# Altium PCB Expansion Header rev1.PcbDoc
Units mm, origin at the board's own origin, x right, y up, seen from the top; angles counter-clockwise.
Board outline 151 x 50.8 mm, 4 copper layers (Top Layer, Internal Plane 1, Internal Plane 2, Bottom Layer), stack 1.573 mm thick; 140 components, 131 nets, 573 pads, 156 vias.
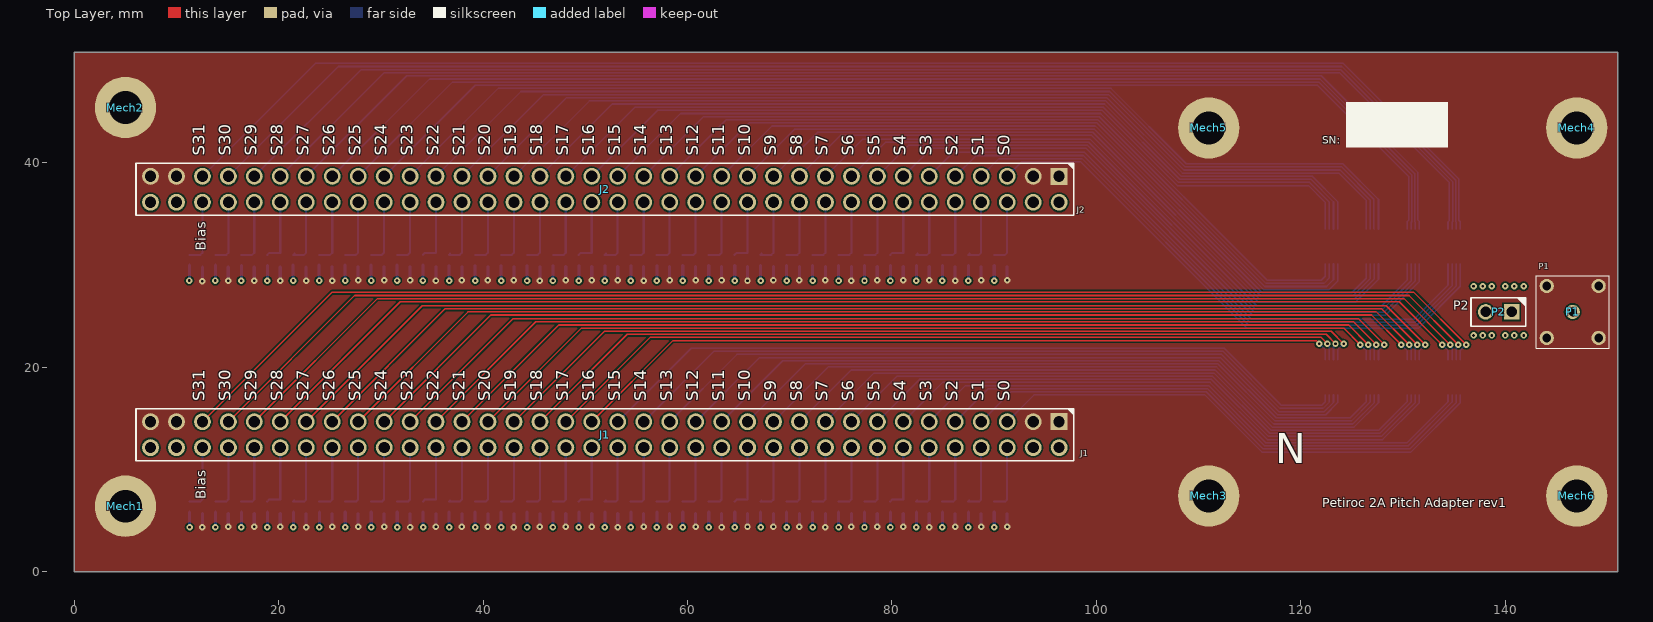
[diagram p0: Top Layer view]
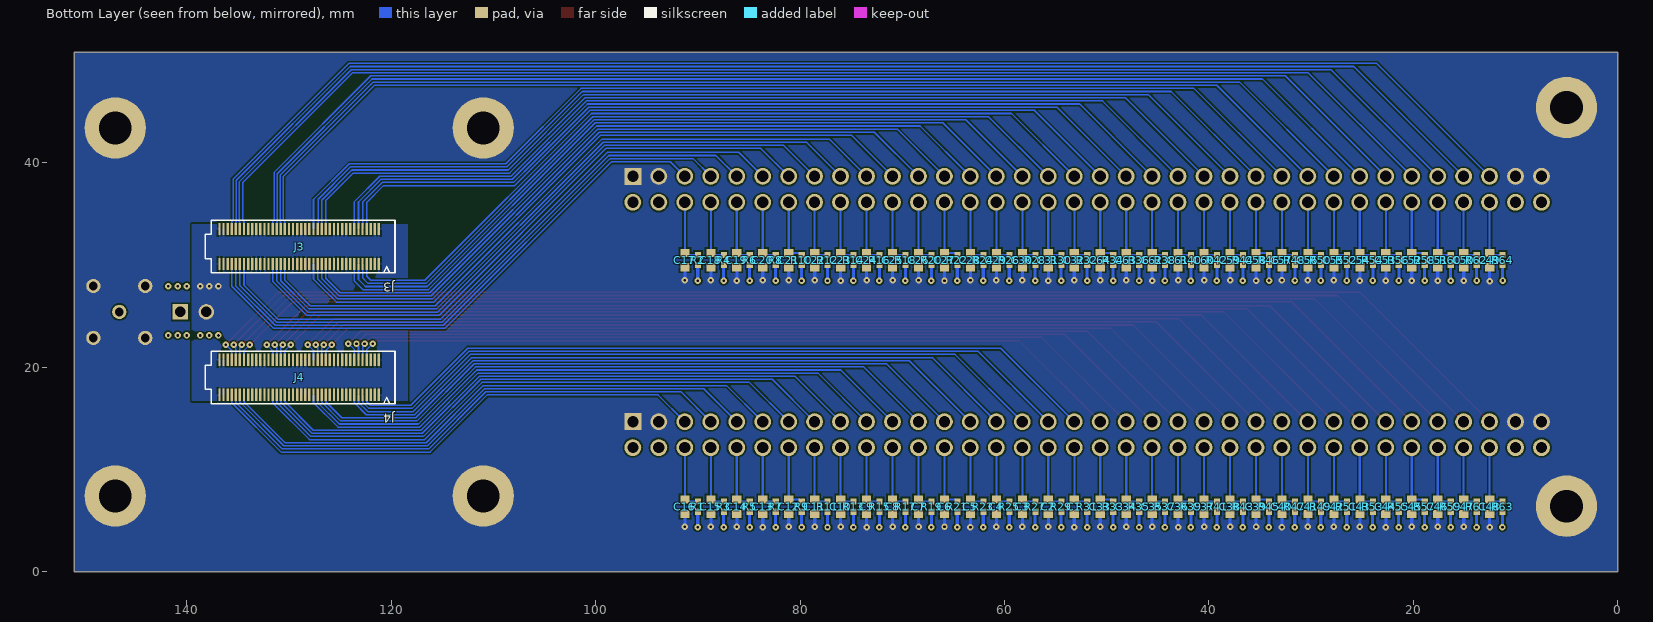
[diagram p1: Bottom Layer view, seen from below]
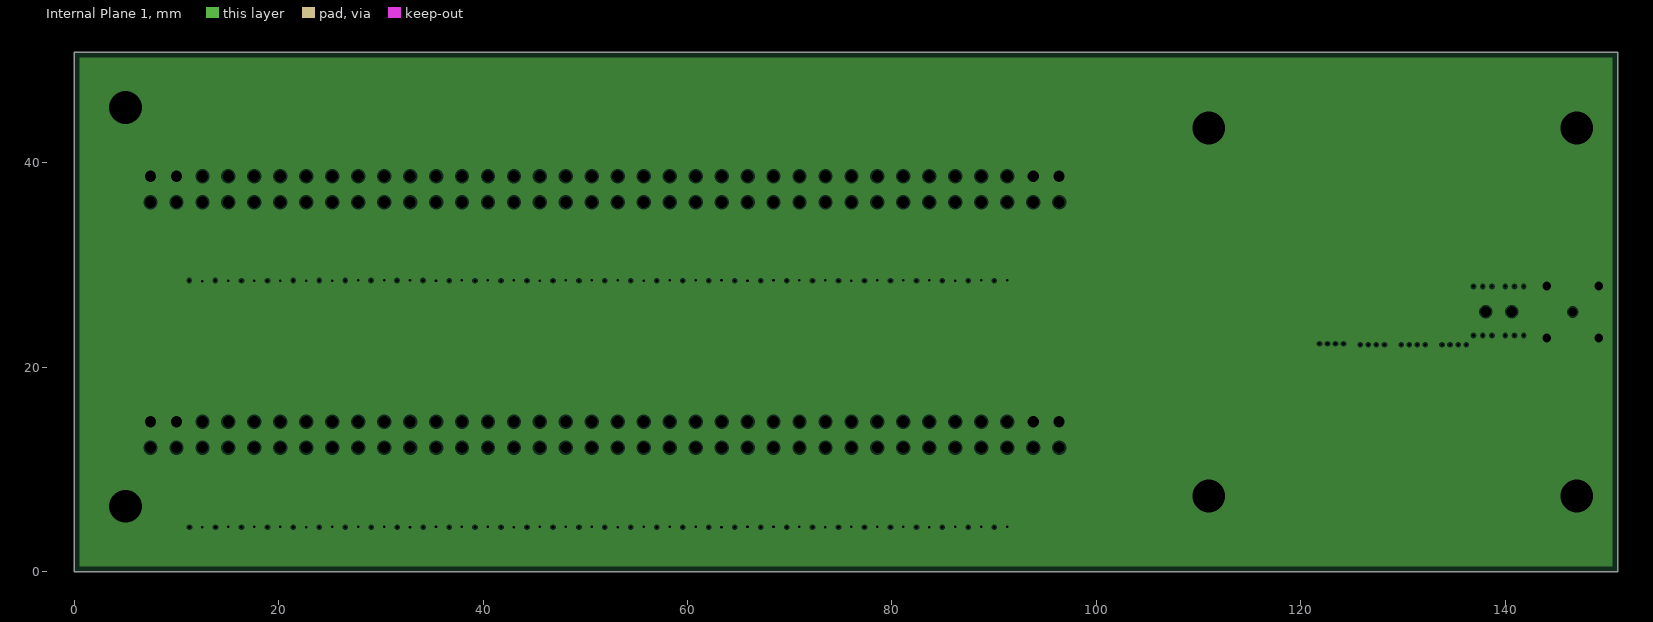
[diagram p2: Internal Plane 1, clearances drawn from the general rule]
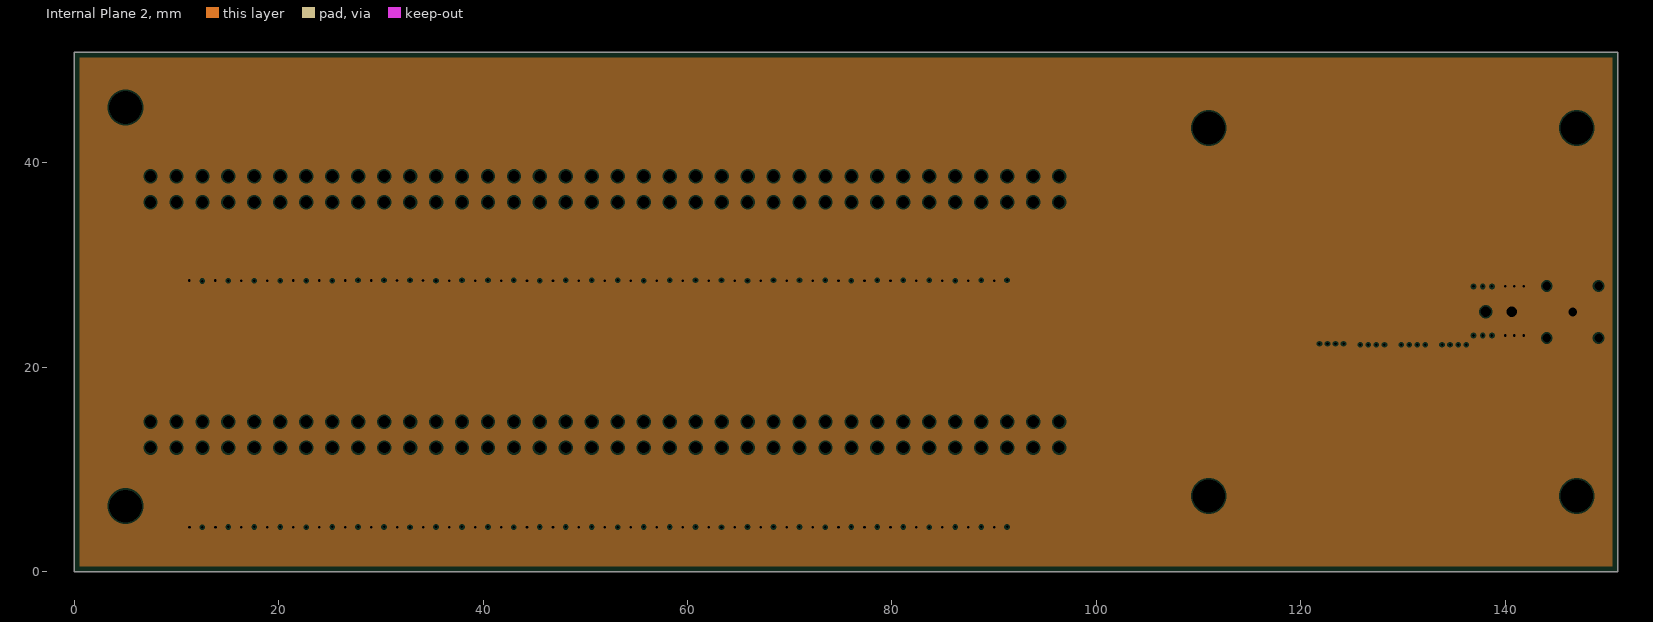
[diagram p3: Internal Plane 2, clearances drawn from the general rule]
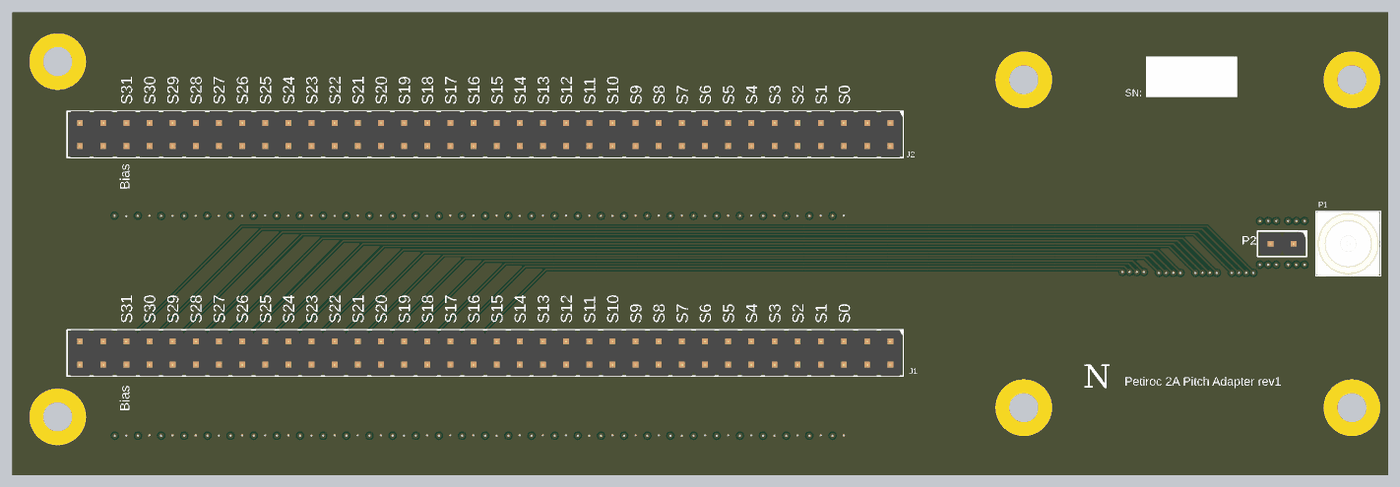
[diagram p4: 3D render of the assembled board from above, using the file's embedded part models]
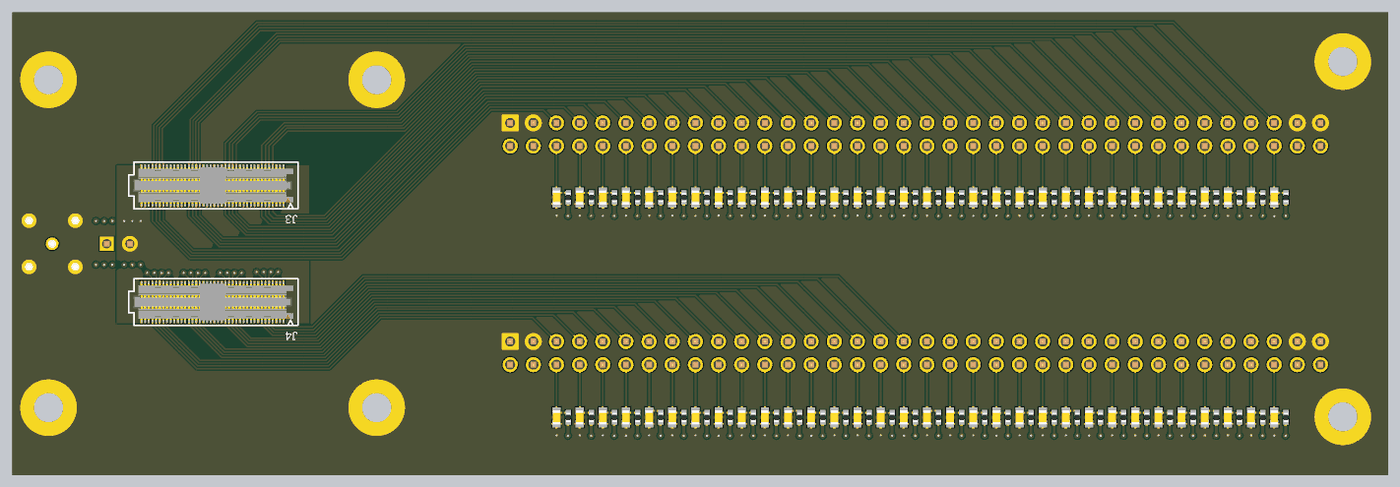
[diagram p5: 3D render of the assembled board from below, using the file's embedded part models]

## Layer stack, top to bottom
Top Solder: solder mask 0.0102, Solder Resist, Dk 3.5
Top Layer: signal copper 0.0356
Dielectric 1: core 0.36, FR-4, Dk 4.2
Internal Plane 1: plane copper 0.036, net GND
Dielectric 3: prepreg 0.71, Dk 4.2
Internal Plane 2: plane copper 0.036, net HV1
Dielectric 2: core 0.36, Dk 4.2
Bottom Layer: signal copper 0.0356
Bottom Solder: solder mask 0.0102, Solder Resist, Dk 3.5

## Board outline
0,0 0,50.8 151,50.8 151,0

## Design rules (kind name [scope] priority, off if disabled: settings)
Clearance HV [InNet('HV')] p1: gap=0.152 ignorepadtopadclearanceinfootprint=FALSE
Clearance [All] p2: gap=0.152 ignorepadtopadclearanceinfootprint=FALSE
DiffPairsRouting [All] p1: maxlimit=1.27 minlimit=0.152 mostfreqgap=0.152 toplayer_minwidth=0.127 toplayer_maxwidth=1.27 toplayer_prefwidth=0.152 bottomlayer_minwidth=0.127 bottomlayer_maxwidth=1.27 bottomlayer_prefwidth=0.152 maxuncoupledlength=12.7
MinimumSolderMaskSliver [All] p1: minsoldermaskwidth=0.025
PlaneClearance [All] p1: clearance=0.152
PlaneConnect [All] p1: planeconnectstyle=Direct reliefexpansion=0.508 reliefentries=4 reliefconductorwidth=0.152 reliefairgap=0.152
PolygonConnect VIas [IsVia or IsThruPin] p1: connectstyle=Direct reliefconductorwidth=0.254 reliefentries=4 polygonreliefangle="90 Angle" airgapwidth=0.254
PolygonConnect [All] p2: connectstyle=Relief reliefconductorwidth=0.152 reliefentries=4 polygonreliefangle="90 Angle" airgapwidth=0.152
RoomDefinition U_Connector_1 [InComponentClass('U_Connector_1')] p1: confinementstyle=ConfineIn formatcopy=TRUE lockcomponents=FALSE outline -205.392,-214.916 -154.592,-214.916 -154.592,-189.516 -205.392,-189.516
RoomDefinition U_Mech [InComponentClass('U_Mech')] p2: confinementstyle=ConfineIn formatcopy=TRUE lockcomponents=FALSE outline 151,0.2 151,50.7 -0.3,50.7 -0.3,0.2
RoutingVias [All] p1: holewidth=0.254 width=0.635 viastyle="Through Hole" minholewidth=0.254 minwidth=0.635 maxholewidth=2.54 maxwidth=5.08
SilkToSolderMaskClearance [IsPad] p1: minsilkscreentomaskgap=0.051 clearancetoexposedcopper=TRUE
SolderMaskExpansion [All] p1: expansion=0.102
Width [All] p1: maxlimit=5.08 minlimit=0.152 preferedwidth=0.152
25 further rules are at their usual default settings.

## Classes and differential pairs
component class U_Mech: Mech1 Mech2 Mech3 Mech4 Mech5 Mech6

## Components (designator, comment, footprint, x,y, rotation, side; value= is the part's Value field where it differs from the comment)
C1 "0603" CAPCERSMD0603 53.163,6.346 r270 bottom value="100 nF 100 V"
C2 "0603" CAPCERSMD0603 55.703,6.346 r270 bottom value="100 nF 100 V"
C3 "0603" CAPCERSMD0603 58.243,6.346 r270 bottom value="100 nF 100 V"
C4 "0603" CAPCERSMD0603 60.783,6.346 r270 bottom value="100 nF 100 V"
C5 "0603" CAPCERSMD0603 63.323,6.346 r270 bottom value="100 nF 100 V"
C6 "0603" CAPCERSMD0603 65.863,6.346 r270 bottom value="100 nF 100 V"
C7 "0603" CAPCERSMD0603 68.403,6.346 r270 bottom value="100 nF 100 V"
C8 "0603" CAPCERSMD0603 70.943,6.346 r270 bottom value="100 nF 100 V"
C9 "0603" CAPCERSMD0603 73.483,6.346 r270 bottom value="100 nF 100 V"
C10 "0603" CAPCERSMD0603 76.023,6.346 r270 bottom value="100 nF 100 V"
C11 "0603" CAPCERSMD0603 78.563,6.346 r270 bottom value="100 nF 100 V"
C12 "0603" CAPCERSMD0603 81.103,6.346 r270 bottom value="100 nF 100 V"
C13 "0603" CAPCERSMD0603 83.643,6.346 r270 bottom value="100 nF 100 V"
C14 "0603" CAPCERSMD0603 86.183,6.346 r270 bottom value="100 nF 100 V"
C15 "0603" CAPCERSMD0603 88.723,6.346 r270 bottom value="100 nF 100 V"
C16 "0603" CAPCERSMD0603 91.263,6.346 r270 bottom value="100 nF 100 V"
C17 "0603" CAPCERSMD0603 91.263,30.479 r270 bottom value="100 nF 100 V"
C18 "0603" CAPCERSMD0603 88.723,30.479 r270 bottom value="100 nF 100 V"
C19 "0603" CAPCERSMD0603 86.183,30.479 r270 bottom value="100 nF 100 V"
C20 "0603" CAPCERSMD0603 83.643,30.479 r270 bottom value="100 nF 100 V"
C21 "0603" CAPCERSMD0603 81.103,30.479 r270 bottom value="100 nF 100 V"
C22 "0603" CAPCERSMD0603 78.563,30.479 r270 bottom value="100 nF 100 V"
C23 "0603" CAPCERSMD0603 76.023,30.479 r270 bottom value="100 nF 100 V"
C24 "0603" CAPCERSMD0603 73.483,30.479 r270 bottom value="100 nF 100 V"
C25 "0603" CAPCERSMD0603 70.943,30.479 r270 bottom value="100 nF 100 V"
C26 "0603" CAPCERSMD0603 68.403,30.479 r270 bottom value="100 nF 100 V"
C27 "0603" CAPCERSMD0603 65.863,30.479 r270 bottom value="100 nF 100 V"
C28 "0603" CAPCERSMD0603 63.323,30.479 r270 bottom value="100 nF 100 V"
C29 "0603" CAPCERSMD0603 60.783,30.479 r270 bottom value="100 nF 100 V"
C30 "0603" CAPCERSMD0603 58.243,30.479 r270 bottom value="100 nF 100 V"
C31 "0603" CAPCERSMD0603 55.703,30.479 r270 bottom value="100 nF 100 V"
C32 "0603" CAPCERSMD0603 53.163,30.479 r270 bottom value="100 nF 100 V"
C33 "0603" CAPCERSMD0603 50.623,6.346 r270 bottom value="100 nF 100 V"
C34 "0603" CAPCERSMD0603 48.083,6.346 r270 bottom value="100 nF 100 V"
C35 "0603" CAPCERSMD0603 45.543,6.346 r270 bottom value="100 nF 100 V"
C36 "0603" CAPCERSMD0603 43.003,6.346 r270 bottom value="100 nF 100 V"
C37 "0603" CAPCERSMD0603 40.463,6.346 r270 bottom value="100 nF 100 V"
C38 "0603" CAPCERSMD0603 37.923,6.346 r270 bottom value="100 nF 100 V"
C39 "0603" CAPCERSMD0603 35.383,6.346 r270 bottom value="100 nF 100 V"
C40 "0603" CAPCERSMD0603 32.843,6.346 r270 bottom value="100 nF 100 V"
C41 "0603" CAPCERSMD0603 30.303,6.346 r270 bottom value="100 nF 100 V"
C42 "0603" CAPCERSMD0603 27.763,6.346 r270 bottom value="100 nF 100 V"
C43 "0603" CAPCERSMD0603 25.223,6.346 r270 bottom value="100 nF 100 V"
C44 "0603" CAPCERSMD0603 22.683,6.346 r270 bottom value="100 nF 100 V"
C45 "0603" CAPCERSMD0603 20.143,6.346 r270 bottom value="100 nF 100 V"
C46 "0603" CAPCERSMD0603 17.603,6.346 r270 bottom value="100 nF 100 V"
C47 "0603" CAPCERSMD0603 15.063,6.346 r270 bottom value="100 nF 100 V"
C48 "0603" CAPCERSMD0603 12.523,6.346 r270 bottom value="100 nF 100 V"
C49 "0603" CAPCERSMD0603 12.523,30.479 r270 bottom value="100 nF 100 V"
C50 "0603" CAPCERSMD0603 15.063,30.479 r270 bottom value="100 nF 100 V"
C51 "0603" CAPCERSMD0603 17.603,30.479 r270 bottom value="100 nF 100 V"
C52 "0603" CAPCERSMD0603 20.143,30.479 r270 bottom value="100 nF 100 V"
C53 "0603" CAPCERSMD0603 22.683,30.479 r270 bottom value="100 nF 100 V"
C54 "0603" CAPCERSMD0603 25.223,30.479 r270 bottom value="100 nF 100 V"
C55 "0603" CAPCERSMD0603 27.763,30.479 r270 bottom value="100 nF 100 V"
C56 "0603" CAPCERSMD0603 30.303,30.479 r270 bottom value="100 nF 100 V"
C57 "0603" CAPCERSMD0603 32.843,30.479 r270 bottom value="100 nF 100 V"
C58 "0603" CAPCERSMD0603 35.383,30.479 r270 bottom value="100 nF 100 V"
C59 "0603" CAPCERSMD0603 37.923,30.479 r270 bottom value="100 nF 100 V"
C60 "0603" CAPCERSMD0603 40.463,30.479 r270 bottom value="100 nF 100 V"
C61 "0603" CAPCERSMD0603 43.003,30.479 r270 bottom value="100 nF 100 V"
C62 "0603" CAPCERSMD0603 45.543,30.479 r270 bottom value="100 nF 100 V"
C63 "0603" CAPCERSMD0603 48.083,30.479 r270 bottom value="100 nF 100 V"
C64 "0603" CAPCERSMD0603 50.623,30.479 r270 bottom value="100 nF 100 V"
J1 "Male 72 pin, dual row, 2.54 mm pitch" Wurth_WR-PHD_male_2rows_vertical_2.54pitch_72ways 51.903,13.396 r180 top
J2 "Male 72 pin, dual row, 2.54 mm pitch" Wurth_WR-PHD_male_2rows_vertical_2.54pitch_72ways 51.903,37.399 r180 top
J3 "ST4-40-1.00-L-D-P-TR" Samtec_ST4-40-1.00-L-D-P-TR 129,31.8 r0 bottom
J4 "ST4-40-1.00-L-D-P-TR" Samtec_ST4-40-1.00-L-D-P-TR 129,19 r0 bottom
Mech1 "M3" PCBPad_M3_Head6mm 5,6.4 r180 top
Mech2 "M3" PCBPad_M3_Head6mm 5,45.4 r180 top
Mech3 "M3" PCBPad_M3_Head6mm 111,7.4 r270 top
Mech4 "M3" PCBPad_M3_Head6mm 147,43.4 r270 top
Mech5 "M3" PCBPad_M3_Head6mm 111,43.4 r270 top
Mech6 "M3" PCBPad_M3_Head6mm 147,7.4 r0 top
P1 "LEMO" LEMO_EPA.00.250.DTN_Vertical 146.6,25.4 r180 top
P2 "Wurth_WR-PHD_2way_2.54mm_male" Wurth_WR-PHD_2way_2.54mm_male 139.35,25.4 r180 top
R1 "0402" RESSMD0402 89.993,6.346 r90 bottom value="1 k"
R2 "0402" RESSMD0402 89.993,30.479 r270 bottom value="1 k"
R3 "0402" RESSMD0402 87.453,6.346 r90 bottom value="1 k"
R4 "0402" RESSMD0402 87.453,30.479 r270 bottom value="1 k"
R5 "0402" RESSMD0402 84.913,6.346 r90 bottom value="1 k"
R6 "0402" RESSMD0402 84.913,30.479 r270 bottom value="1 k"
R7 "0402" RESSMD0402 82.373,6.346 r90 bottom value="1 k"
R8 "0402" RESSMD0402 82.373,30.479 r270 bottom value="1 k"
R9 "0402" RESSMD0402 79.833,6.346 r90 bottom value="1 k"
R10 "0402" RESSMD0402 79.833,30.479 r270 bottom value="1 k"
R11 "0402" RESSMD0402 77.293,6.346 r90 bottom value="1 k"
R12 "0402" RESSMD0402 77.293,30.479 r270 bottom value="1 k"
R13 "0402" RESSMD0402 74.753,6.346 r90 bottom value="1 k"
R14 "0402" RESSMD0402 74.753,30.479 r270 bottom value="1 k"
R15 "0402" RESSMD0402 72.213,6.346 r90 bottom value="1 k"
R16 "0402" RESSMD0402 72.213,30.479 r270 bottom value="1 k"
R17 "0402" RESSMD0402 69.673,6.346 r90 bottom value="1 k"
R18 "0402" RESSMD0402 69.673,30.479 r270 bottom value="1 k"
R19 "0402" RESSMD0402 67.133,6.346 r90 bottom value="1 k"
R20 "0402" RESSMD0402 67.133,30.479 r270 bottom value="1 k"
R21 "0402" RESSMD0402 64.593,6.346 r90 bottom value="1 k"
R22 "0402" RESSMD0402 64.593,30.479 r270 bottom value="1 k"
R23 "0402" RESSMD0402 62.053,6.346 r90 bottom value="1 k"
R24 "0402" RESSMD0402 62.053,30.479 r270 bottom value="1 k"
R25 "0402" RESSMD0402 59.513,6.346 r90 bottom value="1 k"
R26 "0402" RESSMD0402 59.513,30.479 r270 bottom value="1 k"
R27 "0402" RESSMD0402 56.973,6.346 r90 bottom value="1 k"
R28 "0402" RESSMD0402 56.973,30.479 r270 bottom value="1 k"
R29 "0402" RESSMD0402 54.433,6.346 r90 bottom value="1 k"
R30 "0402" RESSMD0402 54.433,30.479 r270 bottom value="1 k"
R31 "0402" RESSMD0402 51.893,6.346 r90 bottom value="1 k"
R32 "0402" RESSMD0402 51.893,30.479 r270 bottom value="1 k"
R33 "0402" RESSMD0402 49.353,6.346 r90 bottom value="1 k"
R34 "0402" RESSMD0402 49.353,30.479 r270 bottom value="1 k"
R35 "0402" RESSMD0402 46.813,6.346 r90 bottom value="1 k"
R36 "0402" RESSMD0402 46.813,30.479 r270 bottom value="1 k"
R37 "0402" RESSMD0402 44.273,6.346 r90 bottom value="1 k"
R38 "0402" RESSMD0402 44.273,30.479 r270 bottom value="1 k"
R39 "0402" RESSMD0402 41.733,6.346 r90 bottom value="1 k"
R40 "0402" RESSMD0402 41.733,30.479 r270 bottom value="1 k"
R41 "0402" RESSMD0402 39.193,6.346 r90 bottom value="1 k"
R42 "0402" RESSMD0402 39.193,30.479 r270 bottom value="1 k"
R43 "0402" RESSMD0402 36.653,6.346 r90 bottom value="1 k"
R44 "0402" RESSMD0402 36.653,30.479 r270 bottom value="1 k"
R45 "0402" RESSMD0402 34.113,6.346 r90 bottom value="1 k"
R46 "0402" RESSMD0402 34.113,30.479 r270 bottom value="1 k"
R47 "0402" RESSMD0402 31.573,6.346 r90 bottom value="1 k"
R48 "0402" RESSMD0402 31.573,30.479 r270 bottom value="1 k"
R49 "0402" RESSMD0402 29.033,6.346 r90 bottom value="1 k"
R50 "0402" RESSMD0402 29.033,30.479 r270 bottom value="1 k"
R51 "0402" RESSMD0402 26.493,6.346 r90 bottom value="1 k"
R52 "0402" RESSMD0402 26.493,30.479 r270 bottom value="1 k"
R53 "0402" RESSMD0402 23.953,6.346 r90 bottom value="1 k"
R54 "0402" RESSMD0402 23.953,30.479 r270 bottom value="1 k"
R55 "0402" RESSMD0402 21.413,6.346 r90 bottom value="1 k"
R56 "0402" RESSMD0402 21.413,30.479 r270 bottom value="1 k"
R57 "0402" RESSMD0402 18.873,6.346 r90 bottom value="1 k"
R58 "0402" RESSMD0402 18.873,30.479 r270 bottom value="1 k"
R59 "0402" RESSMD0402 16.333,6.346 r90 bottom value="1 k"
R60 "0402" RESSMD0402 16.333,30.479 r270 bottom value="1 k"
R61 "0402" RESSMD0402 13.793,6.346 r90 bottom value="1 k"
R62 "0402" RESSMD0402 13.793,30.479 r270 bottom value="1 k"
R63 "0402" RESSMD0402 11.253,6.346 r90 bottom value="1 k"
R64 "0402" RESSMD0402 11.253,30.479 r270 bottom value="1 k"

## Footprints (in the part's own frame and the unit in brackets; to place one, negate y for a bottom-side part, rotate by r counter-clockwise, add the part's x,y. Pads: shape width x height; smd on the part's side, far side on the other; paste and mask are expansions set on the pad)
CAPCERSMD0603 [mm]
  rect 0.8x0.9 smd: 1(-0.7,0) 2(0.7,0)
  body extent -0.8,-0.43 0.8,0.42, height 0.78
LEMO_EPA.00.250.DTN_Vertical [mm] "Connector; RF Coaxial, LEMO, Thru-Hole; 5 Position; Right Angle"
  round 1.4 hole 0.85: 1(0,0) 2(-2.54,-2.54) 3(2.54,-2.54) 4(2.54,2.54) 5(-2.54,2.54)
  silkscreen extent -3.56,-3.56 3.56,3.56, body extent -3.48,-3.48 3.49,3.48, height 14
PCBPad_M3_Head6mm [mm]
  round 6 hole 3.2: 1(0,0)
RESSMD0402 [mm] "Chip Resistor, Body 1.1x0.5mm, IPC High Density"
  rect 0.6x0.6 smd: 1(-0.5,0) 2(0.5,0)
  body extent -0.5,-0.25 0.5,0.25, height 0.3
Samtec_ST4-40-1.00-L-D-P-TR [mm]
  rect 0.23x1.2 smd paste-0.015 mask+0.05: 1(-7.8,1.71) 2(-7.8,-1.71) 3(-7.4,1.71) 4(-7.4,-1.71) 5(-7,1.71) 6(-7,-1.71) 7(-6.6,1.71) 8(-6.6,-1.71) 9(-6.2,1.71) 10(-6.2,-1.71) 11(-5.8,1.71) 12(-5.8,-1.71) 13(-5.4,1.71) 14(-5.4,-1.71) 15(-5,1.71) 16(-5,-1.71) 17(-4.6,1.71) 18(-4.6,-1.71) 19(-4.2,1.71) 20(-4.2,-1.71) 21(-3.8,1.71) 22(-3.8,-1.71) 23(-3.4,1.71) 24(-3.4,-1.71) 25(-3,1.71) 26(-3,-1.71) 27(-2.6,1.71) 28(-2.6,-1.71) 29(-2.2,1.71) 30(-2.2,-1.71) 31(-1.8,1.71) 32(-1.8,-1.71) 33(-1.4,1.71) 34(-1.4,-1.71) 35(-1,1.71) 36(-1,-1.71) 37(-0.6,1.71) 38(-0.6,-1.71) 39(-0.2,1.71) 40(-0.2,-1.71) 41(0.2,1.71) 42(0.2,-1.71) 43(0.6,1.71) 44(0.6,-1.71) 45(1,1.71) 46(1,-1.71) 47(1.4,1.71) 48(1.4,-1.71) 49(1.8,1.71) 50(1.8,-1.71) 51(2.2,1.71) 52(2.2,-1.71) 53(2.6,1.71) 54(2.6,-1.71) 55(3,1.71) 56(3,-1.71) 57(3.4,1.71) 58(3.4,-1.71) 59(3.8,1.71) 60(3.8,-1.71) 61(4.2,1.71) 62(4.2,-1.71) 63(4.6,1.71) 64(4.6,-1.71) 65(5,1.71) 66(5,-1.71) 67(5.4,1.71) 68(5.4,-1.71) 69(5.8,1.71) 70(5.8,-1.71) 71(6.2,1.71) 72(6.2,-1.71) 73(6.6,1.71) 74(6.6,-1.71) 75(7,1.71) 76(7,-1.71) 77(7.4,1.71) 78(7.4,-1.71) 79(7.8,1.71) 80(7.8,-1.71)
  silkscreen extent -9.38,-2.56 9.2,2.56, body extent -8.88,-2 8.7,2, height 3.53
Wurth_WR-PHD_2way_2.54mm_male [mm] "Male 2 way 2.54 mm"
  rect 1.52x1.52 hole 1.02: 1(-1.27,0)
  round 1.52 hole 1.02: 2(1.27,0)
  silkscreen extent -2.67,-1.4 2.7,1.4, body extent -2.54,-1.27 2.54,1.27, height 8.67
Wurth_WR-PHD_male_2rows_vertical_2.54pitch_72ways [mm] "72 pins, dual pin, straight, gold plating"
  rect 1.65x1.65 hole 1.1: 1(-44.45,-1.27)
  round 1.65 hole 1.1: 2(-44.45,1.27) 3(-41.91,-1.27) 4(-41.91,1.27) 5(-39.37,-1.27) 6(-39.37,1.27) 7(-36.83,-1.27) 8(-36.83,1.27) 9(-34.29,-1.27) 10(-34.29,1.27) 11(-31.75,-1.27) 12(-31.75,1.27) 13(-29.21,-1.27) 14(-29.21,1.27) 15(-26.67,-1.27) 16(-26.67,1.27) 17(-24.13,-1.27) 18(-24.13,1.27) 19(-21.59,-1.27) 20(-21.59,1.27) 21(-19.05,-1.27) 22(-19.05,1.27) 23(-16.51,-1.27) 24(-16.51,1.27) 25(-13.97,-1.27) 26(-13.97,1.27) 27(-11.43,-1.27) 28(-11.43,1.27) 29(-8.89,-1.27) 30(-8.89,1.27) 31(-6.35,-1.27) 32(-6.35,1.27) 33(-3.81,-1.27) 34(-3.81,1.27) 35(-1.27,-1.27) 36(-1.27,1.27) 37(1.27,-1.27) 38(1.27,1.27) 39(3.81,-1.27) 40(3.81,1.27) 41(6.35,-1.27) 42(6.35,1.27) 43(8.89,-1.27) 44(8.89,1.27) 45(11.43,-1.27) 46(11.43,1.27) 47(13.97,-1.27) 48(13.97,1.27) 49(16.51,-1.27) 50(16.51,1.27) 51(19.05,-1.27) 52(19.05,1.27) 53(21.59,-1.27) 54(21.59,1.27) 55(24.13,-1.27) 56(24.13,1.27) 57(26.67,-1.27) 58(26.67,1.27) 59(29.21,-1.27) 60(29.21,1.27) 61(31.75,-1.27) 62(31.75,1.27) 63(34.29,-1.27) 64(34.29,1.27) 65(36.83,-1.27) 66(36.83,1.27) 67(39.37,-1.27) 68(39.37,1.27) 69(41.91,-1.27) 70(41.91,1.27) 71(44.45,-1.27) 72(44.45,1.27)
  silkscreen extent -45.87,-2.54 45.87,2.54, body extent -45.72,-2.54 45.72,2.54, height 8.59

## Part data
C1 C2 C3 C4 C5 C6 C7 C8 C9 C10 C11 C12 C13 C14 C15 C16 C17 C18 C19 C20 C21 C22 C23 C24 C25 C26 C27 C28 C29 C30 C31 C32 C33 C34 C35 C36 C37 C38 C39 C40 C41 C42 C43 C44 C45 C46 C47 C48 C49 C50 C51 C52 C53 C54 C55 C56 C57 C58 C59 C60 C61 C62 C63 C64: library part CAPCER0603_X7R_100V_100n, NIClass=Standard, NICode=00650000417
J1 J2: library part Wurth_WR-PHD_male_2rows_vertical_2.54pitch_72ways, "WR-PHD 2.54 mm Dual Pin Header, 72p", NIClass=Standard, NICode=01940001392
J3 J4: library part Samtec_ST4-40-1.00-L-D-P-TR, "ULTRA FINE PITCH SOCKET", NIClass=Standard, NICode=00610001393
Mech1 Mech2 Mech3 Mech4 Mech5 Mech6: library part PCBPad_M3_Head6mm, NIClass=PCBPad, NICode=01250000388
P1: library part LEMO_EPA.00.250.DTN_Vertical, "LEMO EPA 00 Vertical", NIClass=Standard, NICode=00090000216
P2: "Male 2 way 2.54 mm", NIClass=Standard, NICode=00280000455
R1 R2 R3 R4 R5 R6 R7 R8 R9 R10 R11 R12 R13 R14 R15 R16 R17 R18 R19 R20 R21 R22 R23 R24 R25 R26 R27 R28 R29 R30 R31 R32 R33 R34 R35 R36 R37 R38 R39 R40 R41 R42 R43 R44 R45 R46 R47 R48 R49 R50 R51 R52 R53 R54 R55 R56 R57 R58 R59 R60 R61 R62 R63 R64: library part RES0402-1k, NIClass=Standard, NICode=00300000046

## Via types
v1: diameter 0.635, hole 0.254, Top Layer to Bottom Layer, tented both sides, 156 vias

## Nets (pads, with @x,y where several pads share a name; then routed paths per layer and width w, separated by ;. In a path a pad name is that pad's centre, name@x,y a point inside that pad or via, vN(x,y) a via of type N, cw(c..) or ccw(c..) an arc to the next point about the centre after c; other vN are vias at no path point)
GND: C1.2 C2.2 C3.2 C4.2 C5.2 C6.2 C7.2 C8.2 C9.2 C10.2 C11.2 C12.2 C13.2 C14.2 C15.2 C16.2 C17.2 C18.2 C19.2 C20.2 C21.2 C22.2 C23.2 C24.2 C25.2 C26.2 C27.2 C28.2 C29.2 C30.2 C31.2 C32.2 C33.2 C34.2 C35.2 C36.2 C37.2 C38.2 C39.2 C40.2 C41.2 C42.2 C43.2 C44.2 C45.2 C46.2 C47.2 C48.2 C49.2 C50.2 C51.2 C52.2 C53.2 C54.2 C55.2 C56.2 C57.2 C58.2 C59.2 C60.2 C61.2 C62.2 C63.2 C64.2 J1.1 J1.3 J1.69 J1.71 J2.1 J2.3 J2.69 J2.71 Mech1.1 Mech2.1 Mech3.1 Mech4.1 Mech5.1 Mech6.1 P1.2 P1.3 P1.4 P1.5 | length 85.1
  Bottom Layer w0.305: v1(12.523,4.326) C48.2@12.523,5.686 ; v1(12.523,28.419) C49.2 ; v1(15.063,4.366) C47.2@15.063,5.686 ; v1(15.063,28.459) C50.2 ; v1(17.603,4.366) C46.2@17.603,5.686 ; v1(17.603,28.459) C51.2 ; v1(20.143,4.366) C45.2@20.143,5.686 ; v1(20.143,28.459) C52.2 ; v1(22.683,4.326) C44.2@22.683,5.686 ; v1(22.683,28.459) C53.2 ; v1(25.223,4.366) C43.2@25.223,5.686 ; v1(25.223,28.459) C54.2@25.223,29.819 ; v1(27.763,4.366) C42.2@27.763,5.686 ; v1(27.763,28.499) C55.2@27.763,29.819 ; v1(30.303,4.366) C41.2@30.303,5.686 ; v1(30.303,28.499) C56.2@30.303,29.819 ; v1(32.843,4.326) C40.2@32.843,5.686 ; v1(32.843,28.499) C57.2@32.843,29.819 ; v1(35.383,4.366) C39.2@35.383,5.686 ; v1(35.383,28.459) C58.2@35.383,29.819 ; v1(37.923,4.366) C38.2@37.923,5.686 ; v1(37.923,28.499) C59.2@37.923,29.819 ; v1(40.463,4.366) C37.2@40.463,5.686 ; v1(40.463,28.499) C60.2@40.463,29.819 ; v1(43.003,4.326) C36.2@43.003,5.686 ; v1(43.003,28.499) C61.2@43.003,29.819 ; v1(45.543,4.366) C35.2@45.543,5.686 ; v1(45.543,28.459) C62.2@45.543,29.819 ; v1(48.083,4.366) C34.2@48.083,5.686 ; v1(48.083,28.499) C63.2@48.083,29.819 ; v1(50.623,4.366) C33.2@50.623,5.686 ; v1(50.623,28.499) C64.2@50.623,29.819 ; v1(53.163,4.326) C1.2@53.163,5.686 ; v1(53.163,28.499) C32.2@53.163,29.819 ; v1(55.703,4.366) C2.2@55.703,5.686 ; v1(55.703,28.459) C31.2@55.703,29.819 ; v1(58.243,4.366) C3.2@58.243,5.686 ; v1(58.243,28.499) C30.2@58.243,29.819 ; v1(60.783,4.366) C4.2@60.783,5.686 ; v1(60.783,28.499) C29.2@60.783,29.819 ; v1(63.323,4.326) C5.2@63.323,5.686 ; v1(63.323,28.499) C28.2@63.323,29.819 ; v1(65.863,4.366) C6.2@65.863,5.686 ; v1(65.863,28.459) C27.2@65.863,29.819 ; v1(68.403,4.366) C7.2@68.403,5.686 ; v1(68.403,28.499) C26.2@68.403,29.819 ; v1(70.943,4.366) C8.2@70.943,5.686 ; v1(70.943,28.499) C25.2@70.943,29.819 ; v1(73.483,4.326) C9.2@73.483,5.686 ; v1(73.483,28.499) C24.2@73.483,29.819 ; v1(76.023,4.366) C10.2@76.023,5.686 ; v1(76.023,28.459) C23.2@76.023,29.819 ; v1(78.563,4.366) C11.2@78.563,5.686 ; v1(78.563,28.499) C22.2@78.563,29.819 ; v1(81.103,4.366) C12.2@81.103,5.686 ; v1(81.103,28.499) C21.2@81.103,29.819 ; v1(83.643,4.326) C13.2@83.643,5.686 ; v1(83.643,28.499) C20.2@83.643,29.819 ; v1(86.183,4.366) C14.2@86.183,5.686 ; v1(86.183,28.459) C19.2@86.183,29.819 ; v1(88.723,4.366) C15.2@88.723,5.686 ; v1(88.723,28.499) C18.2@88.723,29.819 ; v1(91.263,4.366) C16.2@91.263,5.686 ; v1(91.263,28.499) C17.2@91.263,29.819
HV: P1.1 P2.1 R1.1 R2.2 R3.1 R4.2 R5.1 R6.2 R7.1 R8.2 R9.1 R10.2 R11.1 R12.2 R13.1 R14.2 R15.1 R16.2 R17.1 R18.2 R19.1 R20.2 R21.1 R22.2 R23.1 R24.2 R25.1 R26.2 R27.1 R28.2 R29.1 R30.2 R31.1 R32.2 R33.1 R34.2 R35.1 R36.2 R37.1 R38.2 R39.1 R40.2 R41.1 R42.2 R43.1 R44.2 R45.1 R46.2 R47.1 R48.2 R49.1 R50.2 R51.1 R52.2 R53.1 R54.2 R55.1 R56.2 R57.1 R58.2 R59.1 R60.2 R61.1 R62.2 R63.1 R64.2 | length 96.3
  Bottom Layer w0.305: v1(11.253,28.474) R64.2 ; v1(11.27,4.324) R63.1@11.27,5.829 ; v1(13.793,28.474) R62.2 ; v1(13.81,4.324) R61.1@13.81,5.829 ; v1(16.35,4.324) R59.1@16.35,5.829 ; v1(16.35,28.457) R60.2@16.35,29.962 ; v1(18.89,4.324) R57.1@18.89,5.829 ; v1(18.89,28.457) R58.2@18.89,29.962 ; v1(21.413,28.474) R56.2 ; v1(21.43,4.324) R55.1@21.43,5.829 ; v1(23.953,28.474) R54.2 ; v1(23.97,4.324) R53.1@23.97,5.829 ; v1(26.493,28.474) R52.2 ; v1(26.51,4.324) R51.1@26.51,5.829 ; v1(29.033,28.474) R50.2 ; v1(29.05,4.324) R49.1@29.05,5.829 ; v1(31.573,28.474) R48.2 ; v1(31.59,4.324) R47.1@31.59,5.829 ; v1(34.113,28.474) R46.2 ; v1(34.13,4.324) R45.1@34.13,5.829 ; v1(36.67,4.324) R43.1@36.67,5.829 ; v1(36.67,28.457) R44.2@36.67,29.962 ; v1(39.21,4.324) R41.1@39.21,5.829 ; v1(39.21,28.457) R42.2@39.21,29.962 ; v1(41.75,4.324) R39.1@41.75,5.829 ; v1(41.75,28.457) R40.2@41.75,29.962 ; v1(44.29,4.324) R37.1@44.29,5.829 ; v1(44.29,28.457) R38.2@44.29,29.962 ; v1(46.83,4.324) R35.1@46.83,5.829 ; v1(46.83,28.457) R36.2@46.83,29.962 ; v1(49.37,4.324) R33.1@49.37,5.829 ; v1(49.37,28.457) R34.2@49.37,29.962 ; v1(51.91,4.324) R31.1@51.91,5.829 ; v1(51.91,28.457) R32.2@51.91,29.962 ; v1(54.45,4.324) R29.1@54.45,5.829 ; v1(54.45,28.457) R30.2@54.45,29.962 ; v1(56.99,4.324) R27.1@56.99,5.829 ; v1(56.99,28.457) R28.2@56.99,29.962 ; v1(59.53,4.324) R25.1@59.53,5.829 ; v1(59.53,28.457) R26.2@59.53,29.962 ; v1(62.07,4.324) R23.1@62.07,5.829 ; v1(62.07,28.457) R24.2@62.07,29.962 ; v1(64.61,4.324) R21.1@64.61,5.829 ; v1(64.61,28.457) R22.2@64.61,29.962 ; v1(67.15,4.324) R19.1@67.15,5.829 ; v1(67.15,28.457) R20.2@67.15,29.962 ; v1(69.69,4.324) R17.1@69.69,5.829 ; v1(69.69,28.457) R18.2@69.69,29.962 ; v1(72.23,4.324) R15.1@72.23,5.829 ; v1(72.23,28.457) R16.2@72.23,29.962 ; v1(74.77,4.324) R13.1@74.77,5.829 ; v1(74.77,28.457) R14.2@74.77,29.962 ; v1(77.31,4.324) R11.1@77.31,5.829 ; v1(77.31,28.457) R12.2@77.31,29.962 ; v1(79.85,4.324) R9.1@79.85,5.829 ; v1(79.85,28.457) R10.2@79.85,29.962 ; v1(82.39,4.324) R7.1@82.39,5.829 ; v1(82.39,28.457) R8.2@82.39,29.962 ; v1(84.93,4.324) R5.1@84.93,5.829 ; v1(84.93,28.457) R6.2@84.93,29.962 ; v1(87.47,4.324) R3.1@87.47,5.829 ; v1(87.47,28.457) R4.2@87.47,29.962 ; v1(90.01,4.324) R1.1@90.01,5.829 ; v1(90.01,28.457) R2.2@90.01,29.962
  other v1: 140,23.1 140.9,23.1 141.8,23.1 140,27.9 140.9,27.9 141.8,27.9
HV2: J3.1 J3.2 J3.3 J3.4 J3.17 J3.18 J3.19 J3.20 J3.21 J3.22 J3.23 J3.24 J3.37 J3.38 J3.39 J3.40 J3.41 J3.42 J3.43 J3.44 J3.57 J3.58 J3.59 J3.60 J3.61 J3.62 J3.63 J3.64 J3.77 J3.78 J3.79 J3.80 J4.1 J4.2 J4.3 J4.4 J4.17 J4.18 J4.19 J4.20 J4.21 J4.22 J4.23 J4.24 J4.37 J4.38 J4.39 J4.40 J4.41 J4.42 J4.43 J4.44 J4.57 J4.58 J4.59 J4.60 J4.61 J4.62 J4.63 J4.64 J4.77 J4.78 J4.79 J4.80 P2.2
  other v1: 136.9,27.9 137.8,27.9 138.7,27.9
MPPC_A0: J1.5 J4.73 | length 50.5
  Bottom Layer w0.152: J1.5 93.889,17.282 110.613,17.282 116.201,11.694 130.773,11.694 135.6,16.521 J4.73
MPPC_A1: J1.7 J4.71 | length 52.6
  Bottom Layer w0.152: J1.7 91.654,17.587 110.739,17.587 116.327,11.999 130.647,11.999 135.2,16.552 J4.71
MPPC_A2: J1.9 J4.69 | length 54.7
  Bottom Layer w0.152: J1.9 89.418,17.892 110.866,17.892 116.454,12.304 130.521,12.304 134.8,16.583 J4.69
MPPC_A3: J1.11 J4.67 | length 56.9
  Bottom Layer w0.152: J1.11 87.183,18.196 110.992,18.196 116.58,12.608 130.395,12.608 134.4,16.614 J4.67
MPPC_A4: J1.13 J4.53 | length 56.7
  Bottom Layer w0.152: J1.13 84.948,18.501 111.118,18.501 116.706,12.913 127.993,12.913 131.6,16.521 J4.53
MPPC_A5: J1.15 J4.51 | length 58.8
  Bottom Layer w0.152: J1.15 82.713,18.806 111.244,18.806 116.832,13.218 127.866,13.218 131.2,16.552 J4.51
MPPC_A6: J1.17 J4.49 | length 60.9
  Bottom Layer w0.152: J1.17 80.478,19.111 111.371,19.111 116.959,13.523 127.74,13.523 130.8,16.583 J4.49
MPPC_A7: J1.19 J4.47 | length 63
  Bottom Layer w0.152: J1.19 78.242,19.416 111.497,19.416 117.085,13.828 127.614,13.828 130.4,16.614 J4.47
MPPC_A8: J1.21 J4.33 | length 62.8
  Bottom Layer w0.152: J1.21 76.007,19.72 111.623,19.72 117.211,14.132 125.212,14.132 127.6,16.521 J4.33
MPPC_A9: J1.23 J4.31 | length 64.9
  Bottom Layer w0.152: J1.23 73.772,20.025 111.749,20.025 117.337,14.437 125.086,14.437 127.2,16.552 J4.31
MPPC_A10: J1.25 J4.29 | length 67.1
  Bottom Layer w0.152: J1.25 71.537,20.33 111.876,20.33 117.464,14.742 124.959,14.742 126.8,16.583 J4.29
MPPC_A11: J1.27 J4.27 | length 69.2
  Bottom Layer w0.152: J1.27 69.302,20.635 112.002,20.635 117.59,15.047 124.833,15.047 126.4,16.614 J4.27
MPPC_A12: J1.29 J4.13 | length 69
  Bottom Layer w0.152: J1.29 67.066,20.94 112.128,20.94 117.716,15.352 122.431,15.352 123.6,16.521 J4.13
MPPC_A13: J1.31 J4.11 | length 71.1
  Bottom Layer w0.152: J1.31 64.831,21.244 112.254,21.244 117.842,15.656 122.305,15.656 123.2,16.552 J4.11
MPPC_A14: J1.33 J4.9 | length 73.2
  Bottom Layer w0.152: J1.33 62.596,21.549 112.381,21.549 117.969,15.961 122.178,15.961 122.8,16.583 J4.9
MPPC_A15: J1.35 J4.7 | length 75.3
  Bottom Layer w0.152: J1.35 60.361,21.854 112.507,21.854 118.095,16.266 122.052,16.266 122.4,16.614 J4.7
MPPC_A16: J1.37 J4.8 | length 76.4
  Top Layer w0.152: J1.37 58.567,22.6 121.519,22.6 v1(121.819,22.3)
  Bottom Layer w0.152: v1(121.819,22.3) 122.4,21.719 J4.8
MPPC_A17: J1.39 J4.10 | length 79.8
  Top Layer w0.152: J1.39 56.332,22.905 122.002,22.905 v1(122.606,22.3)
  Bottom Layer w0.152: v1(122.606,22.3) 122.8,22.106 J4.10
MPPC_A18: J1.41 J4.12 | length 83.4
  Top Layer w0.152: J1.41 54.096,23.21 122.484,23.21 v1(123.394,22.3)
  Bottom Layer w0.152: J4.12 123.2,22.106 v1(123.394,22.3)
MPPC_A19: J1.43 J4.14 | length 87.2
  Top Layer w0.152: J1.43 51.861,23.514 122.967,23.514 v1(124.181,22.3)
  Bottom Layer w0.152: J4.14 123.6,21.719 v1(124.181,22.3)
MPPC_A20: J1.45 J4.28 | length 91.5
  Top Layer w0.152: J1.45 49.626,23.819 124.2,23.819 v1(125.819,22.2)
  Bottom Layer w0.152: v1(125.819,22.2) 126.4,21.619 J4.28
MPPC_A21: J1.47 J4.30 | length 95
  Top Layer w0.152: J1.47 47.391,24.124 124.682,24.124 v1(126.606,22.2)
  Bottom Layer w0.152: v1(126.606,22.2) 126.8,22.006 J4.30
MPPC_A22: J1.49 J4.32 | length 98.5
  Top Layer w0.152: J1.49 45.156,24.429 125.165,24.429 v1(127.394,22.2)
  Bottom Layer w0.152: J4.32 127.2,22.006 v1(127.394,22.2)
MPPC_A23: J1.51 J4.34 | length 102.3
  Top Layer w0.152: J1.51 42.92,24.734 125.647,24.734 v1(128.181,22.2)
  Bottom Layer w0.152: J4.34 127.6,21.619 v1(128.181,22.2)
MPPC_A24: J1.53 J4.48 | length 106.8
  Top Layer w0.152: J1.53 40.747,25.1 126.919,25.1 v1(129.819,22.2)
  Bottom Layer w0.152: v1(129.819,22.2) 130.4,21.619 J4.48
MPPC_A25: J1.55 J4.50 | length 110.3
  Top Layer w0.152: J1.55 38.512,25.405 127.401,25.405 v1(130.606,22.2)
  Bottom Layer w0.152: v1@130.606,22.1 v1(130.606,22.2) 130.8,22.006 J4.50
MPPC_A26: J1.57 J4.52 | length 113.8
  Top Layer w0.152: J1.57 36.276,25.71 127.884,25.71 v1(131.394,22.2)
  Bottom Layer w0.152: J4.52 131.2,22.006 v1(131.394,22.2)
MPPC_A27: J1.59 J4.54 | length 117.5
  Top Layer w0.152: J1.59 34.041,26.014 128.367,26.014 v1(132.181,22.2)
  Bottom Layer w0.152: J4.54 131.6,21.619 v1(132.181,22.2)
MPPC_A28: J1.61 J4.68 | length 122
  Top Layer w0.152: J1.61 31.887,26.4 129.619,26.4 v1(133.819,22.2)
  Bottom Layer w0.152: v1(133.819,22.2) 134.4,21.619 J4.68
MPPC_A29: J1.63 J4.70 | length 125.4
  Top Layer w0.152: J1.63 29.652,26.705 130.102,26.705 v1(134.606,22.2)
  Bottom Layer w0.152: v1(134.606,22.2) 134.8,22.006 J4.70
MPPC_A30: J1.65 J4.72 | length 129
  Top Layer w0.152: J1.65 27.416,27.01 130.584,27.01 v1(135.394,22.2)
  Bottom Layer w0.152: J4.72 135.2,22.006 v1(135.394,22.2)
MPPC_A31: J1.67 J4.74 | length 132.7
  Top Layer w0.152: J1.67 25.181,27.314 131.067,27.314 v1(136.181,22.2)
  Bottom Layer w0.152: J4.74 135.6,21.619 v1(136.181,22.2)
MPPC_B0: J2.5 J3.73 | length 55.6
  Bottom Layer w0.152: J2.5 92.704,40.1 98.456,40.1 114.77,23.786 131.479,23.786 135.6,27.907 J3.73
MPPC_B1: J2.7 J3.71 | length 57.7
  Bottom Layer w0.152: J2.7 90.469,40.405 98.582,40.405 114.896,24.09 131.353,24.09 135.2,27.938 J3.71
MPPC_B2: J2.9 J3.69 | length 59.8
  Bottom Layer w0.152: J2.9 88.233,40.71 98.708,40.71 115.023,24.395 131.226,24.395 134.8,27.969 J3.69
MPPC_B3: J2.11 J3.67 | length 61.9
  Bottom Layer w0.152: J2.11 85.998,41.014 98.835,41.014 115.149,24.7 131.1,24.7 134.4,28 J3.67
MPPC_B4: J2.13 J3.53 | length 61.4
  Bottom Layer w0.152: J2.13 83.844,41.4 98.994,41.4 115.309,25.086 128.286,25.086 131.6,28.4 J3.53
MPPC_B5: J2.15 J3.51 | length 63.6
  Bottom Layer w0.152: J2.15 81.609,41.705 99.121,41.705 115.435,25.39 128.159,25.39 131.2,28.431 J3.51
MPPC_B6: J2.17 J3.49 | length 65.7
  Bottom Layer w0.152: J2.17 79.373,42.01 99.247,42.01 115.561,25.695 128.033,25.695 130.8,28.462 J3.49
MPPC_B7: J2.19 J3.47 | length 67.8
  Bottom Layer w0.152: J2.19 77.138,42.314 99.373,42.314 115.687,26 127.907,26 130.4,28.493 J3.47
MPPC_B8: J2.21 J3.33 | length 67.5
  Bottom Layer w0.152: J2.21 74.965,42.681 99.525,42.681 115.839,26.366 125.36,26.366 125.968,26.975 126.057,27.064 126.147,27.153 127.6,28.607 J3.33
MPPC_B9: J2.23 J3.31 | length 69.6
  Bottom Layer w0.152: J2.23 72.729,42.986 99.651,42.986 115.965,26.671 125.233,26.671 125.842,27.28 125.931,27.369 127.2,28.638 J3.31
MPPC_B10: J2.25 J3.29 | length 71.7
  Bottom Layer w0.152: J2.25 70.494,43.29 99.777,43.29 116.092,26.976 125.107,26.976 125.716,27.584 126.8,28.669 J3.29
MPPC_B11: J2.27 J3.27 | length 73.8
  Bottom Layer w0.152: J2.27 68.259,43.595 99.904,43.595 116.218,27.281 124.981,27.281 126.4,28.7 J3.27
MPPC_B12: J2.29 J3.13 | length 73.8
  Bottom Layer w0.152: J2.29 66.024,43.9 100.03,43.9 116.344,27.586 122.786,27.586 123.6,28.4 J3.13
MPPC_B13: J2.31 J3.11 | length 75.8
  Bottom Layer w0.152: J2.31 63.789,44.205 100.156,44.205 116.47,27.89 122.522,27.89 123.2,28.569 J3.11
MPPC_B14: J2.33 J3.9 | length 77.8
  Bottom Layer w0.152: J2.33 61.553,44.51 100.282,44.51 116.597,28.195 122.261,28.195 122.8,28.734 J3.9
MPPC_B15: J2.35 J3.7 | length 79.9
  Bottom Layer w0.152: J2.35 59.318,44.814 100.409,44.814 116.723,28.5 122,28.5 122.4,28.9 J3.7
MPPC_B16: J2.37 J3.8 | length 81.5
  Bottom Layer w0.152: J2.37@50.633,39.429 J2.37 57.093,45.13 100.539,45.13 107.903,37.766 120.74,37.766 122.4,36.107 J3.8
MPPC_B17: J2.39 J3.10 | length 84.4
  Bottom Layer w0.152: J2.39@48.093,39.089 J2.39 54.858,45.434 100.666,45.434 106,40.1 106.007,40.1 108.036,38.071 120.867,38.071 122.8,36.138 J3.10
MPPC_B18: J2.41 J3.12 | length 87.5
  Bottom Layer w0.152: J2.41@45.873,38.669 J2.41 52.628,45.744 100.794,45.744 108.162,38.376 120.993,38.376 123.2,36.169 J3.12
MPPC_B19: J2.43 J3.14 | length 90.4
  Bottom Layer w0.152: J2.43 50.393,46.049 100.92,46.049 108.288,38.681 121.119,38.681 123.6,36.2 J3.14
MPPC_B20: J2.45 J3.28 | length 96.1
  Bottom Layer w0.152: J2.45 48.157,46.354 101.046,46.354 108.414,38.986 123.714,38.986 126.4,36.3 J3.28
MPPC_B21: J2.47 J3.30 | length 99.3
  Bottom Layer w0.152: J2.47 45.927,46.663 101.175,46.663 108.547,39.29 123.847,39.29 126.8,36.338 J3.30
MPPC_B22: J2.49 J3.32 | length 102.8
  Bottom Layer w0.152: J2.49@35.393,38.989 J2.49 43.692,46.968 101.301,46.968 108.674,39.595 123.974,39.595 127.144,36.425 127.144,33.566 J3.32
MPPC_B23: J2.51 J3.34 | length 105.7
  Bottom Layer w0.152: J2.51 41.457,47.273 101.427,47.273 108.8,39.9 124.1,39.9 127.6,36.4 J3.34
MPPC_B24: J2.53 J3.48 | length 112.8
  Bottom Layer w0.152: J2.53 39.228,47.584 121.627,47.584 130.543,38.669 130.543,34.36 130.4,34.217 J3.48
MPPC_B25: J2.55 J3.50 | length 116
  Bottom Layer w0.152: J2.55 36.993,47.889 121.754,47.889 130.848,38.795 130.848,34.234 130.8,34.186 J3.50
MPPC_B26: J2.57 J3.52 | length 119.1
  Bottom Layer w0.152: J2.57 34.758,48.194 121.88,48.194 131.152,38.921 131.152,34.234 131.2,34.186 J3.52
MPPC_B27: J2.59 J3.54 | length 122.3
  Bottom Layer w0.152: J2.59 32.522,48.499 122.006,48.499 131.457,39.048 131.457,34.36 131.6,34.217 J3.54
MPPC_B28: J2.61 J3.68 | length 127.6
  Bottom Layer w0.152: J2.61 30.287,48.803 123.773,48.803 134.543,38.034 134.543,34.36 134.4,34.217 J3.68
MPPC_B29: J2.63 J3.70 | length 130.8
  Bottom Layer w0.152: J2.63 28.052,49.108 123.899,49.108 134.848,38.16 134.848,34.234 134.8,34.186 J3.70
MPPC_B30: J2.65 J3.72 | length 133.9
  Bottom Layer w0.152: J2.65 25.817,49.413 124.026,49.413 135.152,38.286 135.152,34.234 135.2,34.186 J3.72
MPPC_B31: J2.67 J3.74 | length 137.1
  Bottom Layer w0.152: J2.67 23.582,49.718 124.152,49.718 135.457,38.413 135.457,34.36 135.6,34.217 J3.74
NetC1_1: C1.1 J1.36 R31.2 | length 6.5
  Bottom Layer w0.203: R31.2@52.013,6.966 R31.2 52.963,6.846 C1.1 J1.36@53.163,11.986
NetC2_1: C2.1 J1.34 R29.2 | length 6.3
  Bottom Layer w0.203: R29.2 55.503,6.846 C2.1 55.713,7.056 J1.34@55.713,11.996
NetC3_1: C3.1 J1.32 R27.2 | length 6.3
  Bottom Layer w0.203: R27.2 58.043,6.846 C3.1 J1.32@58.243,11.986
NetC4_1: C4.1 J1.30 R25.2 | length 6.3
  Bottom Layer w0.203: R25.2 60.583,6.846 C4.1 J1.30@60.783,11.986
NetC5_1: C5.1 J1.28 R23.2 | length 6.3
  Bottom Layer w0.203: R23.2 63.123,6.846 C5.1 J1.28@63.323,11.986
NetC6_1: C6.1 J1.26 R21.2 | length 6.3
  Bottom Layer w0.203: R21.2 64.793,7.046 C6.1 J1.26@65.863,11.986
NetC7_1: C7.1 J1.24 R19.2 | length 6.5
  Bottom Layer w0.203: R19.2@67.253,6.966 R19.2 68.203,6.846 C7.1 J1.24@68.403,11.986
NetC8_1: C8.1 J1.22 R17.2 | length 6.3
  Bottom Layer w0.203: R17.2 70.743,6.846 C8.1 70.953,7.056 J1.22@70.953,11.996
NetC9_1: C9.1 J1.20 R15.2 | length 6.3
  Bottom Layer w0.203: R15.2 73.283,6.846 C9.1 J1.20@73.483,11.986
NetC10_1: C10.1 J1.18 R13.2 | length 6.3
  Bottom Layer w0.203: R13.2 75.823,6.846 C10.1 J1.18@76.023,11.986
NetC11_1: C11.1 J1.16 R11.2 | length 6.3
  Bottom Layer w0.203: R11.2 78.363,6.846 C11.1 J1.16@78.563,11.986
NetC12_1: C12.1 J1.14 R9.2 | length 6.3
  Bottom Layer w0.203: R9.2 80.033,7.046 C12.1 J1.14@81.103,11.986
NetC13_1: C13.1 J1.12 R7.2 | length 6.5
  Bottom Layer w0.203: R7.2@82.493,6.966 R7.2 83.443,6.846 C13.1 J1.12@83.643,11.986
NetC14_1: C14.1 J1.10 R5.2 | length 6.3
  Bottom Layer w0.203: R5.2 85.983,6.846 C14.1 86.193,7.056 J1.10@86.193,11.996
NetC15_1: C15.1 J1.8 R3.2 | length 6.5
  Bottom Layer w0.203: R3.2@87.573,6.966 R3.2 88.523,6.846 C15.1 J1.8@88.723,11.986
NetC16_1: C16.1 J1.6 R1.2 | length 6.3
  Bottom Layer w0.203: R1.2 91.063,6.846 C16.1 91.273,7.056 J1.6@91.273,11.996
NetC17_1: C17.1 J2.6 R2.1 | length 6.3
  Bottom Layer w0.203: R2.1 91.063,30.979 C17.1 91.273,31.189 J2.6
NetC18_1: C18.1 J2.8 R4.1 | length 6.5
  Bottom Layer w0.203: R4.1@87.573,31.099 R4.1 88.523,30.979 C18.1 J2.8@88.723,36.119
NetC19_1: C19.1 J2.10 R6.1 | length 6.3
  Bottom Layer w0.203: R6.1 85.983,30.979 C19.1 86.193,31.189 J2.10
NetC20_1: C20.1 J2.12 R8.1 | length 6.5
  Bottom Layer w0.203: R8.1@82.493,31.099 R8.1 83.443,30.979 C20.1 J2.12@83.643,36.119
NetC21_1: C21.1 J2.14 R10.1 | length 6.3
  Bottom Layer w0.203: R10.1 80.033,31.179 C21.1 J2.14@81.103,36.119
NetC22_1: C22.1 J2.16 R12.1 | length 6.3
  Bottom Layer w0.203: R12.1 78.363,30.979 C22.1 J2.16@78.563,36.119
NetC23_1: C23.1 J2.18 R14.1 | length 6.3
  Bottom Layer w0.203: R14.1 75.823,30.979 C23.1 J2.18@76.023,36.119
NetC24_1: C24.1 J2.20 R16.1 | length 6.3
  Bottom Layer w0.203: R16.1 73.283,30.979 C24.1 J2.20@73.483,36.119
NetC25_1: C25.1 J2.22 R18.1 | length 6.3
  Bottom Layer w0.203: R18.1 70.743,30.979 C25.1 70.953,31.189 J2.22
NetC26_1: C26.1 J2.24 R20.1 | length 6.5
  Bottom Layer w0.203: R20.1@67.253,31.099 R20.1 68.203,30.979 C26.1 J2.24@68.403,36.119
NetC27_1: C27.1 J2.26 R22.1 | length 6.3
  Bottom Layer w0.203: R22.1 64.793,31.179 C27.1 J2.26@65.863,36.119
NetC28_1: C28.1 J2.28 R24.1 | length 6.3
  Bottom Layer w0.203: R24.1 63.123,30.979 C28.1 J2.28@63.323,36.119
NetC29_1: C29.1 J2.30 R26.1 | length 6.3
  Bottom Layer w0.203: R26.1 60.583,30.979 C29.1 J2.30@60.783,36.119
NetC30_1: C30.1 J2.32 R28.1 | length 6.3
  Bottom Layer w0.203: R28.1 58.043,30.979 C30.1 J2.32@58.243,36.119
NetC31_1: C31.1 J2.34 R30.1 | length 6.3
  Bottom Layer w0.203: R30.1 55.503,30.979 C31.1 55.713,31.189 J2.34
NetC32_1: C32.1 J2.36 R32.1 | length 6.5
  Bottom Layer w0.203: R32.1@52.013,31.099 R32.1 52.963,30.979 C32.1 J2.36@53.163,36.119
NetC33_1: C33.1 J1.38 R33.2 | length 6.3
  Bottom Layer w0.203: R33.2 49.553,7.046 C33.1 J1.38@50.623,11.986
NetC34_1: C34.1 J1.40 R35.2 | length 6.3
  Bottom Layer w0.203: R35.2 47.883,6.846 C34.1 J1.40@48.083,11.986
NetC35_1: C35.1 J1.42 R37.2 | length 6.3
  Bottom Layer w0.203: R37.2 45.343,6.846 C35.1 J1.42@45.543,11.986
NetC36_1: C36.1 J1.44 R39.2 | length 6.3
  Bottom Layer w0.203: R39.2 42.803,6.846 C36.1 J1.44@43.003,11.986
NetC37_1: C37.1 J1.46 R41.2 | length 6.3
  Bottom Layer w0.203: R41.2 40.263,6.846 C37.1 40.473,7.056 J1.46@40.473,11.996
NetC38_1: C38.1 J1.48 R43.2 | length 6.5
  Bottom Layer w0.203: R43.2@36.773,6.966 R43.2 37.723,6.846 C38.1 J1.48@37.923,11.986
NetC39_1: C39.1 J1.50 R45.2 | length 6.3
  Bottom Layer w0.203: R45.2 34.313,7.046 C39.1 J1.50@35.383,11.986
NetC40_1: C40.1 J1.52 R47.2 | length 6.3
  Bottom Layer w0.203: R47.2 32.643,6.846 C40.1 J1.52@32.843,11.986
NetC41_1: C41.1 J1.54 R49.2 | length 6.3
  Bottom Layer w0.203: R49.2 30.103,6.846 C41.1 J1.54@30.303,11.986
NetC42_1: C42.1 J1.56 R51.2 | length 6.3
  Bottom Layer w0.203: R51.2 27.563,6.846 C42.1 J1.56@27.763,11.986
NetC43_1: C43.1 J1.58 R53.2 | length 6.3
  Bottom Layer w0.203: R53.2 25.023,6.846 C43.1 25.233,7.056 J1.58@25.233,11.996
NetC44_1: C44.1 J1.60 R55.2 | length 6.5
  Bottom Layer w0.203: R55.2@21.533,6.966 R55.2 22.483,6.846 C44.1 J1.60@22.683,11.986
NetC45_1: C45.1 J1.62 R57.2 | length 6.3
  Bottom Layer w0.203: R57.2 19.073,7.046 C45.1 J1.62@20.143,11.986
NetC46_1: C46.1 J1.64 R59.2 | length 6.3
  Bottom Layer w0.203: R59.2 17.403,6.846 C46.1 J1.64@17.603,11.986
NetC47_1: C47.1 J1.66 R61.2 | length 6.3
  Bottom Layer w0.203: R61.2 14.863,6.846 C47.1 J1.66@15.063,11.986
NetC48_1: C48.1 J1.68 R63.2 | length 6.3
  Bottom Layer w0.203: R63.2 12.323,6.846 C48.1 J1.68@12.523,11.986
NetC49_1: C49.1 J2.68 R64.1 | length 6.3
  Bottom Layer w0.203: R64.1 12.323,30.979 C49.1 J2.68@12.523,36.119
NetC50_1: C50.1 J2.66 R62.1 | length 6.3
  Bottom Layer w0.203: R62.1 14.863,30.979 C50.1 J2.66@15.063,36.119
NetC51_1: C51.1 J2.64 R60.1 | length 6.3
  Bottom Layer w0.203: R60.1 17.403,30.979 C51.1 J2.64@17.603,36.119
NetC52_1: C52.1 J2.62 R58.1 | length 6.3
  Bottom Layer w0.203: R58.1 19.073,31.179 C52.1 J2.62@20.143,36.119
NetC53_1: C53.1 J2.60 R56.1 | length 6.5
  Bottom Layer w0.203: R56.1@21.533,31.099 R56.1 22.483,30.979 C53.1 J2.60@22.683,36.119
NetC54_1: C54.1 J2.58 R54.1 | length 6.3
  Bottom Layer w0.203: R54.1 25.023,30.979 C54.1 25.233,31.189 J2.58
NetC55_1: C55.1 J2.56 R52.1 | length 6.3
  Bottom Layer w0.203: R52.1 27.563,30.979 C55.1 J2.56@27.763,36.119
NetC56_1: C56.1 J2.54 R50.1 | length 6.3
  Bottom Layer w0.203: R50.1 30.103,30.979 C56.1 J2.54@30.303,36.119
NetC57_1: C57.1 J2.52 R48.1 | length 6.3
  Bottom Layer w0.203: R48.1 32.643,30.979 C57.1 J2.52@32.843,36.119
NetC58_1: C58.1 J2.50 R46.1 | length 6.3
  Bottom Layer w0.203: R46.1 34.313,31.179 C58.1 J2.50@35.383,36.119
NetC59_1: C59.1 J2.48 R44.1 | length 6.5
  Bottom Layer w0.203: R44.1@36.773,31.099 R44.1 37.723,30.979 C59.1 J2.48@37.923,36.119
NetC60_1: C60.1 J2.46 R42.1 | length 6.3
  Bottom Layer w0.203: R42.1 40.263,30.979 C60.1 40.473,31.189 J2.46
NetC61_1: C61.1 J2.44 R40.1 | length 6.3
  Bottom Layer w0.203: R40.1 42.803,30.979 C61.1 J2.44@43.003,36.119
NetC62_1: C62.1 J2.42 R38.1 | length 6.3
  Bottom Layer w0.203: R38.1 45.343,30.979 C62.1 J2.42@45.543,36.119
NetC63_1: C63.1 J2.40 R36.1 | length 6.3
  Bottom Layer w0.203: R36.1 47.883,30.979 C63.1 J2.40@48.083,36.119
NetC64_1: C64.1 J2.38 R34.1 | length 6.3
  Bottom Layer w0.203: R34.1 49.553,31.179 C64.1 J2.38@50.623,36.119
pads on no net: J1.2 J1.4 J1.70 J1.72 J2.2 J2.4 J2.70 J2.72 J3.5 J3.6 J3.15 J3.16 J3.25 J3.26 J3.35 J3.36 J3.45 J3.46 J3.55 J3.56 J3.65 J3.66 J3.75 J3.76 J4.5 J4.6 J4.15 J4.16 J4.25 J4.26 J4.35 J4.36 J4.45 J4.46 J4.55 J4.56 J4.65 J4.66 J4.75 J4.76
copper on no net:
  other v1: 136.9,23.1 137.8,23.1 138.7,23.1

## Polygon pours and split planes (outlines as drawn)
GND on Bottom Layer "GNDbot" (solid, remove dead copper, pour order 20): 0,50.8 151,50.8 151,0 0,0
HV2 on Bottom Layer "HV" (solid, remove dead copper, pour order 18): 118.4,34 118.4,16.7 139.5,16.7 139.5,34
GND on Top Layer "GNDtop" (solid, remove dead copper, pour order 12): 0,50.8 151,50.8 151,0 0,0
GND on Internal Plane 1 (split plane): 150.49,0.51 0.51,0.51 0.51,50.29 150.49,50.29
HV on Internal Plane 2 (split plane): 150.49,0.51 0.51,0.51 0.51,50.29 150.49,50.29

## Silkscreen, mask and mechanical layers (free items; w line width, h text height)
Top Overlay:
  region: 134.4,45.95 124.4,45.95 124.4,41.5 134.4,41.5
  text "SN:" at 122.1,41.6 h1.27
  text "S31" at 13.167,40.671 h2 r90
  text "S30" at 15.707,40.671 h2 r90
  text "S29" at 18.247,40.671 h2 r90
  text "S28" at 20.787,40.671 h2 r90
  text "S27" at 23.327,40.671 h2 r90
  text "S26" at 25.867,40.671 h2 r90
  text "S25" at 28.407,40.671 h2 r90
  text "S24" at 30.947,40.671 h2 r90
  text "S23" at 33.487,40.671 h2 r90
  text "S22" at 36.027,40.671 h2 r90
  text "S21" at 38.567,40.671 h2 r90
  text "S20" at 41.107,40.671 h2 r90
  text "S19" at 43.647,40.671 h2 r90
  text "S18" at 46.187,40.671 h2 r90
  text "S17" at 48.727,40.671 h2 r90
  text "S16" at 51.267,40.671 h2 r90
  text "S15" at 53.807,40.671 h2 r90
  text "S14" at 56.347,40.671 h2 r90
  text "S13" at 58.887,40.671 h2 r90
  text "S12" at 61.427,40.671 h2 r90
  text "S11" at 63.967,40.671 h2 r90
  text "S10" at 66.507,40.671 h2 r90
  text "S9" at 69.047,40.671 h2 r90
  text "S8" at 71.587,40.671 h2 r90
  text "S7" at 74.127,40.671 h2 r90
  text "S6" at 76.667,40.671 h2 r90
  text "S5" at 79.207,40.671 h2 r90
  text "S4" at 81.747,40.671 h2 r90
  text "S3" at 84.287,40.671 h2 r90
  text "S2" at 86.827,40.671 h2 r90
  text "S1" at 89.367,40.671 h2 r90
  text "S0" at 91.907,40.671 h2 r90
  text "Bias" at 13.178,31.4 h1.65 r90
  text "S31" at 13.167,16.668 h2 r90
  text "S30" at 15.707,16.668 h2 r90
  text "S29" at 18.247,16.668 h2 r90
  text "S28" at 20.787,16.668 h2 r90
  text "S27" at 23.327,16.668 h2 r90
  text "S26" at 25.867,16.668 h2 r90
  text "S25" at 28.407,16.668 h2 r90
  text "S24" at 30.947,16.668 h2 r90
  text "S23" at 33.487,16.668 h2 r90
  text "S22" at 36.027,16.668 h2 r90
  text "S21" at 38.567,16.668 h2 r90
  text "S20" at 41.107,16.668 h2 r90
  text "S19" at 43.647,16.668 h2 r90
  text "S18" at 46.187,16.668 h2 r90
  text "S17" at 48.727,16.668 h2 r90
  text "S16" at 51.267,16.668 h2 r90
  text "S15" at 53.807,16.668 h2 r90
  text "S14" at 56.347,16.668 h2 r90
  text "S13" at 58.887,16.668 h2 r90
  text "S12" at 61.427,16.668 h2 r90
  text "S11" at 63.967,16.668 h2 r90
  text "S10" at 66.507,16.668 h2 r90
  text "S9" at 69.047,16.668 h2 r90
  text "S8" at 71.587,16.668 h2 r90
  text "S7" at 74.127,16.668 h2 r90
  text "S6" at 76.667,16.668 h2 r90
  text "S5" at 79.207,16.668 h2 r90
  text "S4" at 81.747,16.668 h2 r90
  text "S3" at 84.287,16.668 h2 r90
  text "S2" at 86.827,16.668 h2 r90
  text "S1" at 89.367,16.668 h2 r90
  text "S0" at 91.907,16.668 h2 r90
  text "N" at 117.5,9.6 h5
  text "Bias" at 13.178,7.067 h1.65 r90
  text "Petiroc 2A Pitch Adapter rev1" at 122.1,6 h1.5
M1-NI internal:
  lines w0.254: 0,0 0,3.4 0,50.8 151,50.8 151,3.4 151,0 0,0